# Altium PCB PCB1.PcbDoc
Units mil, origin at the board's own origin, x right, y up, seen from the top; angles counter-clockwise.
Board outline 3795 x 2235 mil, 2 copper layers (Top Layer, Bottom Layer); 23 components, 31 nets, 95 pads, 11 vias.
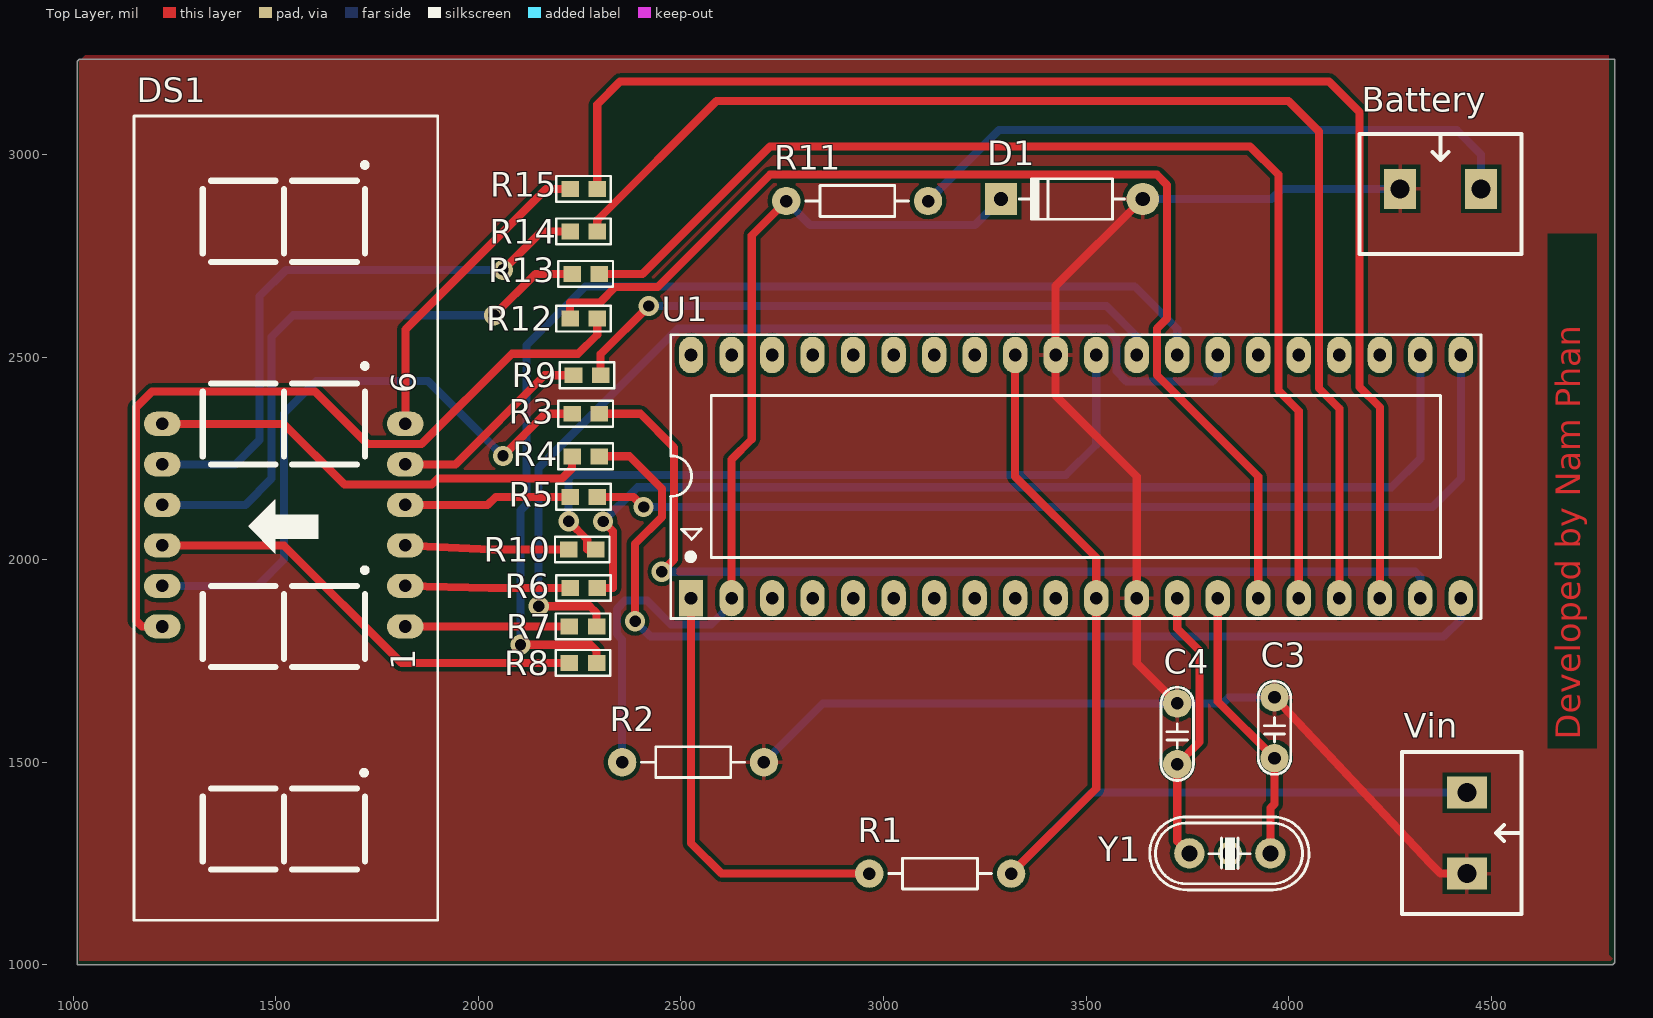
[diagram p0: Top Layer view]
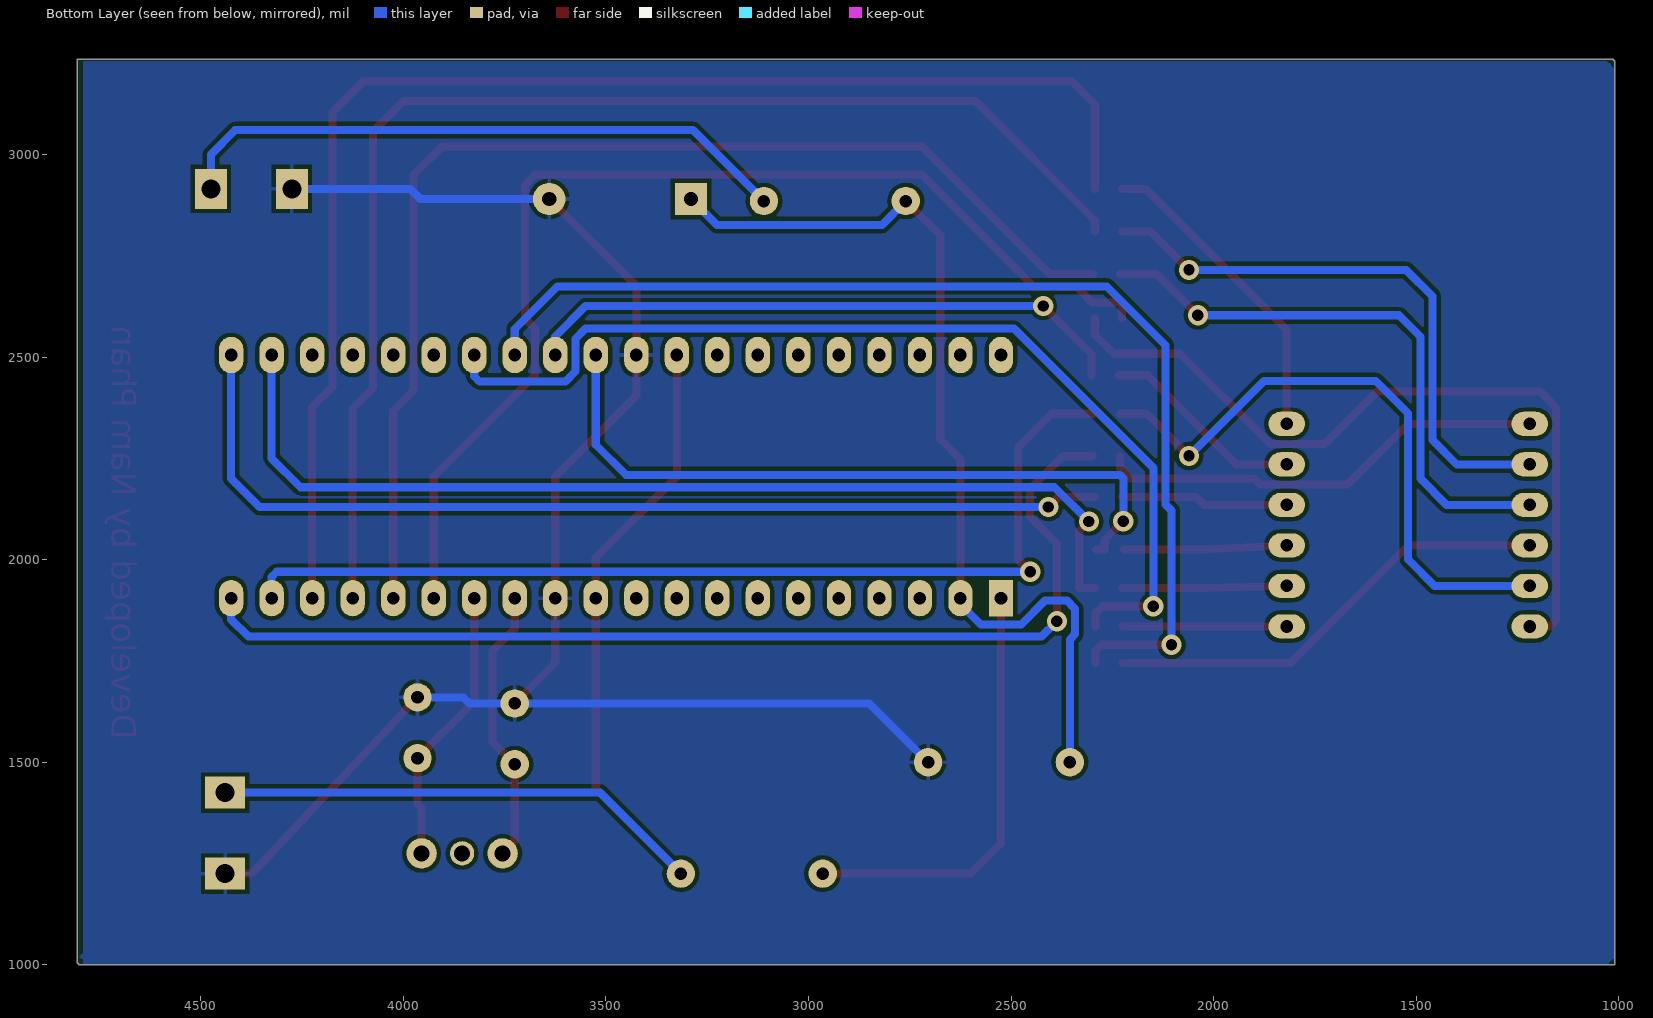
[diagram p1: Bottom Layer view, seen from below]

## Layer stack, top to bottom
Top Solder: solder mask 0.4, Solder Resist, Dk 3.5
Top Layer: signal copper 1.4
Dielectric 1: dielectric 12.6, FR-4, Dk 4.8
Bottom Layer: signal copper 1.4
Bottom Solder: solder mask 0.4, Solder Resist, Dk 3.5

## Board outline
4805,3235 4805,1005 4800,1000 1010,1000 1010,3230 1015,3235

## Design rules (kind name [scope] priority, off if disabled: settings)
Clearance [All] p1: gap=10 ignorepadtopadclearanceinfootprint=FALSE except(0: Arc-Hole Track-Hole SMDPad-Hole THPad-Hole Via-Hole Fill-Hole Poly-Hole Region-Hole Text-Hole)
PolygonConnect [All] p1: connectstyle=Relief reliefconductorwidth=10 reliefentries=4 polygonreliefangle="90 Angle" airgapwidth=10
RoutingVias [All] p1: holewidth=28 width=50 viastyle="Through Hole" minholewidth=28 minwidth=50 maxholewidth=28 maxwidth=50
SolderMaskExpansion [All] p1: expansion=4 istentingtop=FALSE
Width [All] p1: maxlimit=25 minlimit=15 preferedwidth=20 minimp=50.000000 maximp=50.000000 favimp=50.000000
30 further rules are at their usual default settings.

## Components (designator, comment, footprint, x,y, rotation, side; value= is the part's Value field where it differs from the comment)
Battery "Header 2 - M" "Medium - Header 2" 4375,2915 r0 top
C3 "33pF" CN1.5 3965,1510 r90 top value=0.01uF
C4 "33pF" CN1.5 3725,1495 r90 top value=0.01uF
D1 "Diode Zener" D1A 3640,2890 r0 top
DS1 "7SEGQ" LED7SEG-4-0.56 1820,1835 r90 top value="LED 7Q SEG"
R1 "10k" R1/4W 3315,1225 r180 top value="R1/4W - 1K"
R2 "1k" R1/4W 2355,1500 r0 top value="R1/4W - 1K"
R3 "100" "RESC-0603 (1608)" 2265,2360 r0 top value=5K6
R4 "100" "RESC-0603 (1608)" 2265,2255 r0 top value=5K6
R5 "100" "RESC-0603 (1608)" 2260,2155 r0 top value=5K6
R6 "100" "RESC-0603 (1608)" 2260,1930 r0 top value=5K6
R7 "100" "RESC-0603 (1608)" 2258.46,1835 r0 top value=5K6
R8 "100" "RESC-0603 (1608)" 2258.46,1745 r0 top value=5K6
R9 "100" "RESC-0603 (1608)" 2268.46,2455 r0 top value=5K6
R10 "100" "RESC-0603 (1608)" 2256.54,2025 r0 top value=5K6
R11 "4k" R1/4W 2760,2885 r0 top value="R1/4W - 1K"
R12 "100" "RESC-0603 (1608)" 2260,2595 r0 top value=5K6
R13 "100" "RESC-0603 (1608)" 2265,2705 r180 top value=5K6
R14 "100" "RESC-0603 (1608)" 2260,2810 r180 top value=5K6
R15 "100" "RESC-0603 (1608)" 2260,2915 r180 top value=5K6
U1 "PIC16F887-PU" DIP40/W0.6 2525,1905 r0 top
Vin "Header 2 - M" "Medium - Header 2" 4440,1325 r270 top (schematic designator Nguồn)
Y1 "20MHz" XT2 3855,1275 r0 top

## Footprints (in the part's own frame and the unit in brackets; to place one, negate y for a bottom-side part, rotate by r counter-clockwise, add the part's x,y. Pads: shape width x height; smd on the part's side, far side on the other; paste and mask are expansions set on the pad)
CN1.5 [mil]
  round 70 hole 31: 1(0,0) 2(150,0)
  silkscreen extent -40,-40 190,40, body extent -40,-33 190,33, height 235
D1A [mil] "Diode 1A, W 100mil, L 350mil"
  round 80 hole 35: 1(0,0)
  rect 80x80 hole 35: 2(-350,0)
  silkscreen extent -305,-50 -45,50, body extent -386,-33 34,36, height 84
DIP40/W0.6 [mil] "40 PIN, W 600mil, Pin to pin 100mil"
  rect 60x90 hole 31: 1(0,0)
  oval 60x90 hole 31: 2(100,0) 3(200,0) 4(300,0) 5(400,0) 6(500,0) 7(600,0) 8(700,0) 9(800,0) 10(900,0) 11(1000,0) 12(1100,0) 13(1200,0) 14(1300,0) 15(1400,0) 16(1500,0) 17(1600,0) 18(1700,0) 19(1800,0) 20(1900,0) 21(1900,600) 22(1800,600) 23(1700,600) 24(1600,600) 25(1500,600) 26(1400,600) 27(1300,600) 28(1200,600) 29(1100,600) 30(1000,600) 31(900,600) 32(800,600) 33(700,600) 34(600,600) 35(500,600) 36(400,600) 37(300,600) 38(200,600) 39(100,600) 40(0,600)
  silkscreen extent -50,-50 1950,650, body extent -82,-10 1982,600, height 224
LED7SEG-4-0.56 [mil]
  oval 60x90 hole 31: 1(0,0) 2(100,0) 3(200,0) 4(300,0) 5(400,0) 6(500,0) 7(500,600) 8(400,600) 9(300,600) 10(200,600) 11(100,600) 12(0,600)
  silkscreen extent -725,-80 1260,670, body extent -720,-80 1260,668, height 565
"Medium - Header 2" [mm]
  rect 2x2.5 hole 1.2: 1(-2.54,0) 2(2.54,0)
  silkscreen extent -5.08,-4.08 5.08,3.43, body extent -5,-4.07 5,3.43, height 10
R1/4W [mil] "R 1/4W, 2 Pin, 350mil"
  round 70 hole 31: 1(0,0) 2(350,0)
  silkscreen extent 48,-38 302,38, body extent -40,-47 386,47, height 111
"RESC-0603 (1608)" [mm] "Resistor, Chip; 1.60 mm L X 0.80 mm W X 0.50 mm H body"
  rect 1.1x1 smd mask+0.1: 1(-0.85,0) 2(0.85,0)
  silkscreen extent -1.71,-0.81 1.71,0.81, body extent -0.8,-0.4 0.8,0.4, height 0.5
XT2 [mm] "Footpin for Crystal 2 pin"
  round 1.524 hole 1: 0(0,0)
  round 1.905 hole 1: 1(-2.54,0) 2(2.54,0)
  silkscreen extent -5.03,-2.29 4.96,2.29, body extent -5.93,-2.36 5.42,2.29, height 3.5

## Part data
Battery Vin: "Header, 2-Pin, Medium", LatestRevisionDate=17-Jul-2002, LatestRevisionNote="Re-released for DXP Platform.", Publisher="Altium Limited"
C3 C4: library part CN1.5, "Cap np 682pF => 104pF"
D1: "Diode  Zener"
DS1: library part LED7SEG-4, "Four 7 Seg Dipslay"
R1 R2 R11: library part R1/4W, "Resistor 1/4W"
R3 R4 R5 R6 R7 R8 R9 R10 R12 R13 R14 R15: library part RC0603FR-075K6L, "RES SMD 5.6K OHM 1% 1/10W 0603", Category=RESISTOR, CompanyID=VT-00869, MPN=RC0603FR-075K6L, Solder=SMT
U1: "Flash-Based, 8-Bit CMOS Microcontroller with nanoWatt Technology, 8K (x14-Bit words) Program Memory, 624 Bytes Data Memory, 35 I/O pins, 40-Pin PDIP, Standard VDD Range, Extended Temperature", Supplier Part Number 1=PIC16F887-E/P-ND, ComponentLink1Description=Datasheet, ComponentLink1URL=http://ww1.microchip.com/downloads/en/DeviceDoc/41291F.pdf, ComponentLink2Description="Packaging Specification", ComponentLink2URL=http://www.microchip.com/stellent/groups/techpub_sg/documents/packagingspec/en012702.pdf, ComponentLink3Description="Microchip.com Home", ComponentLink3URL=http://www.microchip.com/, DatasheetVersion="revF, Apr-2009", LatestRevisionDate=02-Dec-2009, LatestRevisionNote="Updated datasheet to version revF, Apr-2009.", PackageDescription="40-Lead Plastic Dual In-Line (P) - 600 mil Body [PDIP]", PackageReference=PDIP600-P40, PackageVersion="revBB, Aug-2009", Published=29-Jan-2009, Publisher="Altium Limited", Supplier 1=Digi-Key, Supplier 2=Farnell, Supplier Part Number 2=1703423
Y1: library part Crystal, "Crystal Oscillator", LatestRevisionDate=17-Jul-2002, LatestRevisionNote="Re-released for DXP Platform.", PackageReference=R38, Published=8-Jun-2000, Publisher="Altium Limited"

## Via types
v1: diameter 50, hole 28, Top Layer to Bottom Layer, 11 vias

## Nets (pads, with @x,y where several pads share a name; then routed paths per layer and width w, separated by ;. In a path a pad name is that pad's centre, name@x,y a point inside that pad or via, vN(x,y) a via of type N, cw(c..) or ccw(c..) an arc to the next point about the centre after c; other vN are vias at no path point)
+5V: R1.1 U1.11 U1.32 Vin.1 | length 2657.7
  Top Layer w20: R1.1 3525,1435 U1.11 3525,2005 3325,2205 U1.32
  Bottom Layer w20: R1.1 3515,1425 Vin.1
a: DS1.11 R3.1 | length 1552.3
  Top Layer w20: v1(2061,2256) 2165,2360 R3.1
  Bottom Layer w20: DS1.11 1455,1935 1520,2000 1520,2361 1600,2441 1876,2441 v1(2061,2256)
b: DS1.7 R4.1 | length 1120.2
  Top Layer w20: DS1.7 1520,2335 1670,2185 1885,2185 1900,2200 2206.54,2200 2231.54,2225 R4.1
c: DS1.4 R5.1 | length 414.8
  Top Layer w20: DS1.4 2023,2135 2043,2155 R5.1
d: DS1.2 R6.1 | length 406.6
  Top Layer w20: DS1.2 2028,1930 R6.1
d0: DS1.12 R12.2 | length 1956.9
  Top Layer w20: DS1.12 1170,1835 1155,1850 1155,2375 1195,2415 1597,2415 1727,2285 1860,2285 2083,2508 2246.46,2508 2293.46,2555 R12.2
d1: DS1.9 R13.2 | length 1452.7
  Top Layer w20: v1(2039,2603) 2141,2705 R13.2
  Bottom Layer w20: DS1.9 1425,2135 1490,2200 1490,2550 1543,2603 v1(2039,2603)
d2: DS1.8 R14.2 | length 1452.7
  Top Layer w20: v1(2061,2715) 2156,2810 R14.2
  Bottom Layer w20: DS1.8 1400,2235 1460,2295 1460,2650 1525,2715 v1(2061,2715)
d3: DS1.6 R15.2 | length 783.3
  Top Layer w20: DS1.6 1820,2568 2167,2915 R15.2
dp: DS1.3 R10.1 | length 403.3
  Top Layer w20: DS1.3 2031,2025 R10.1
e: DS1.1 R7.1 | length 405
  Top Layer w20: DS1.1 R7.1
f: DS1.10 R8.1 | length 1125.1
  Top Layer w20: DS1.10 1520,2035 1810,1745 R8.1
g: DS1.5 R9.1 | length 506.1
  Top Layer w20: DS1.5 1943.74,2235 2163.74,2455 R9.1
GND: Battery.1 C3.2 C4.2 D1.1 R2.2 U1.12 U1.31 Vin.2 | length 4092.7
  Top Layer w20: D1.1 3425,2675 U1.31 3425,2405 3625,2205 U1.12 3625,1745 C4.2 ; C3.2 4350,1250 4375,1225 Vin.2
  Bottom Layer w20: R2.2 2850,1645 C4.2 3837,1645 3852,1660 C3.2 ; D1.1 3958,2890 3983,2915 Battery.1
NetBattery_2: Battery.2 R11.2 | length 1547.3
  Bottom Layer w20: R11.2 3285,3060 4415,3060 4475,3000 Battery.2
NetD1_2: D1.2 R2.1 R11.1 U1.2 | length 2352.4
  Top Layer w20: U1.2 2625,2247 2675,2297 2675,2800 R11.1
  Bottom Layer w20: R2.1 2355,1803 2342,1816 2342,1878.5 2362.5,1899 2416,1899 2475,1840 2575,1840 2625,1890 U1.2 ; R11.1 2819,2826 3226,2826 D1.2
NetR1_2: R1.2 U1.1 | length 1076.1
  Top Layer w20: U1.1 2525,1300 2600,1225 R1.2
NetR3_2: R3.2 U1.19 | length 2468
  Top Layer w20: R3.2 2400,2360 2483,2277 2483,2000 v1(2453,1970)
  Bottom Layer w20: v1(2453,1970) 4312.5,1970 4325,1957.5 U1.19
NetR4_2: R4.2 U1.20 | length 2665.9
  Top Layer w20: R4.2 2373,2255 2453,2175 2453,2105.16 2387,2039.16 v1(2387,1848)
  Bottom Layer w20: v1(2387,1848) 2425,1810 4382.5,1810 4425,1852.5 U1.20
NetR5_2: R5.2 U1.21 | length 2475.9
  Top Layer w20: R5.2 2383,2155 v1(2408,2130)
  Bottom Layer w20: v1(2408,2130) 4355,2130 4425,2200 U1.21
NetR6_2: R6.2 U1.22 | length 2549.1
  Top Layer w20: R6.2 2332,1930 2332,2070 v1(2308,2094)
  Bottom Layer w20: v1(2308,2094) 2392.58,2178.58 4253.58,2178.58 4325,2250 U1.22
NetR7_2: R7.2 U1.27 | length 2500.9
  Top Layer w20: v1(2149,1885) 2275,1885 2291.93,1868.07 R7.2
  Bottom Layer w20: v1(2149,1885) 2149,2226 2493,2570 3550,2570 3575,2545 3575,2465 3600,2440 3812.5,2440 3825,2452.5 U1.27
NetR8_2: R8.2 U1.28 | length 2742.9
  Top Layer w20: v1(2104,1790) 2276.93,1790 2291.93,1775 R8.2
  Bottom Layer w20: v1(2104,1790) 2104,2121 2119,2136 2119,2529 2264,2674 3620,2674 3725,2569 U1.28
NetR9_2: R9.2 U1.29 | length 1501.4
  Top Layer w20: R9.2 2301.93,2507 v1(2420.93,2626)
  Bottom Layer w20: v1(2420.93,2626) 3550,2626 3625,2551 U1.29
NetR10_2: R10.2 U1.30 | length 1773.1
  Top Layer w20: v1(2223,2095) 2269,2049 2269,2025 R10.2
  Bottom Layer w20: v1(2223,2095) 2223,2200 2231.58,2208.58 3450,2208.58 3525,2283.58 U1.30
NetR12_1: R12.1 U1.15 | length 2788.2
  Top Layer w20: R12.1 2226.54,2635 2300,2635 2338,2673 2443,2673 2720,2950 3675,2950 3700,2925 3700,2595 3675,2570 3675,2455 3925,2205 U1.15
NetR13_1: R13.1 U1.16 | length 2901.7
  Top Layer w20: R13.1 2405,2705 2720,3020 3905,3020 3975,2950 3975,2417 4025,2367 U1.16
NetR14_1: R14.1 U1.17 | length 3134.8
  Top Layer w20: R14.1 2293.46,2837.5 2587.96,3132 4000,3132 4075,3057 4075,2423 4125,2373 U1.17
NetR15_1: R15.1 U1.18 | length 3365.2
  Top Layer w20: R15.1 2293.46,3123.46 2350,3180 4100,3180 4175,3105 4175,2426 4225,2376 U1.18
OSC1: C4.1 U1.13 Y1.1 | length 688
  Top Layer w20: U1.13 3725,1830 3780,1775 3780,1550 C4.1 3725,1305 Y1.1
OSC2: C3.1 U1.14 Y1.2 | length 692.1
  Top Layer w20: U1.14 3825,1650 C3.1 3965,1397 3955,1387 Y1.2
pads on no net: U1.3 U1.4 U1.5 U1.6 U1.7 U1.8 U1.9 U1.10 U1.23 U1.24 U1.25 U1.26 U1.33 U1.34 U1.35 U1.36 U1.37 U1.38 U1.39 U1.40 Y1.0

## Polygon pours and split planes (outlines as drawn)
GND on Bottom Layer "GND_L02_P001" (solid, remove dead copper, pour order 1): 1015,3225 4785,3225 4790,3220 4790,1000 1030,1000 1015,1015 1020,1020 1020,3220
no net on Bottom Layer "NONET_L02_P002" (solid, pour order 2): 1017.5,3232.5 1010,3225 1010,1015 4795,1015 4797.5,1017.5 4790,1025 4790,3230 1020,3230
GND on Bottom Layer "GND_L02_P000" (solid, remove dead copper, pour order 0): 1015,3235 1020,3230 4790,3230 4790,1030 4800,1020 4795,1015 1010,1015 1010,3210 1030,3230 1040,3230
GND on Top Layer "GND_L01_P003" (solid, remove dead copper, pour order 3): 1015,3230 1015,1010 4795,1010 4800,1015 4790,1025 4790,3245 1030,3245

## Other copper
Top Layer:
  text "Developed by Nam Phan" at 4720.01,1555 h60 r90

## Text inside footprints (layer, text, board x,y; h text height)
DS1: Top Overlay "1" at 1844,1727 h60 r90; Top Overlay "6" at 1846,2410 h60 r90